# Altium PCB euu.PcbDoc
Units mm, origin at the board's own origin, x right, y up, seen from the top; angles counter-clockwise.
Board outline 35.28 x 34.49 mm, 2 copper layers (Top Layer, Bottom Layer), stack 1.58 mm thick; 25 components, 47 nets, 96 pads, 26 vias.
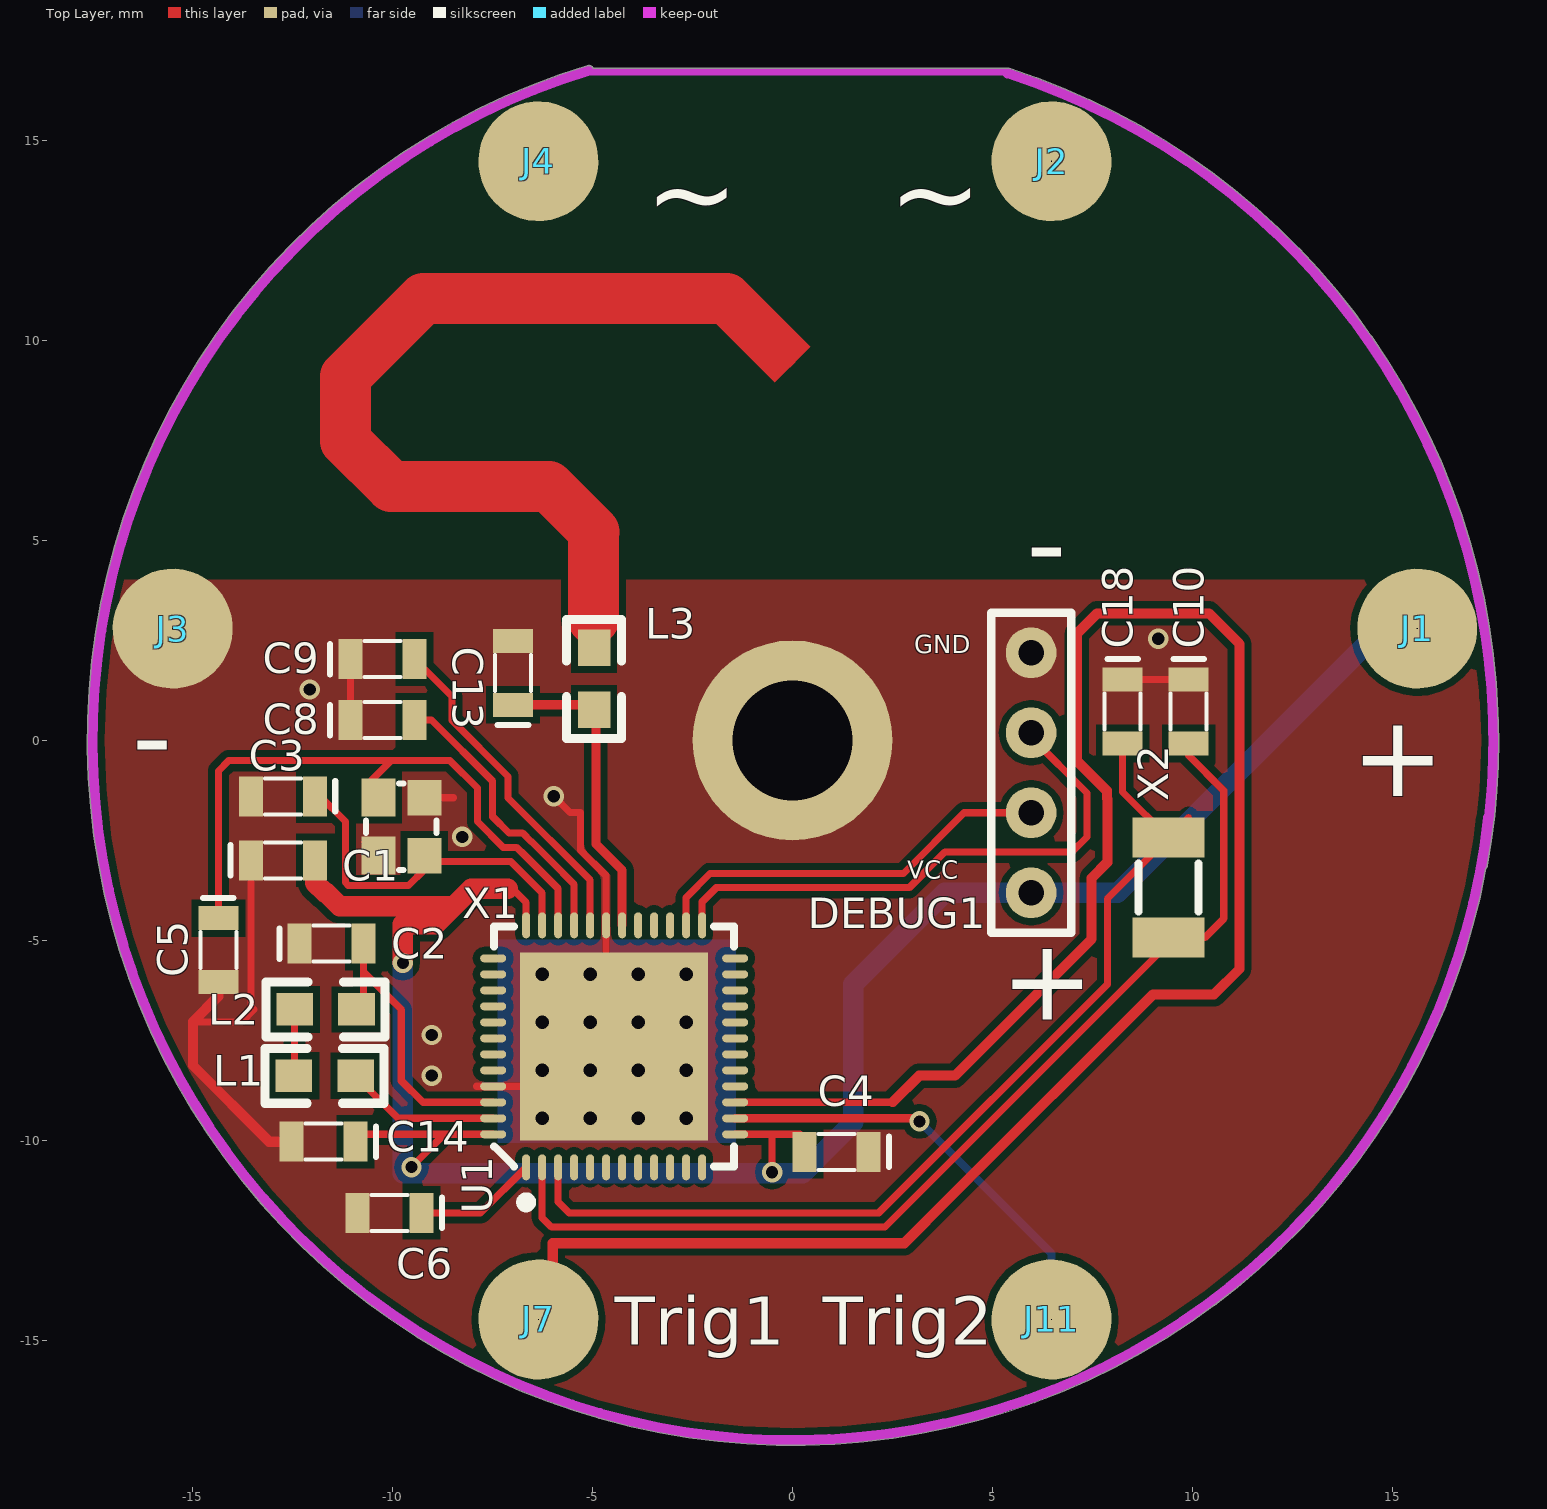
[diagram p0: Top Layer view]
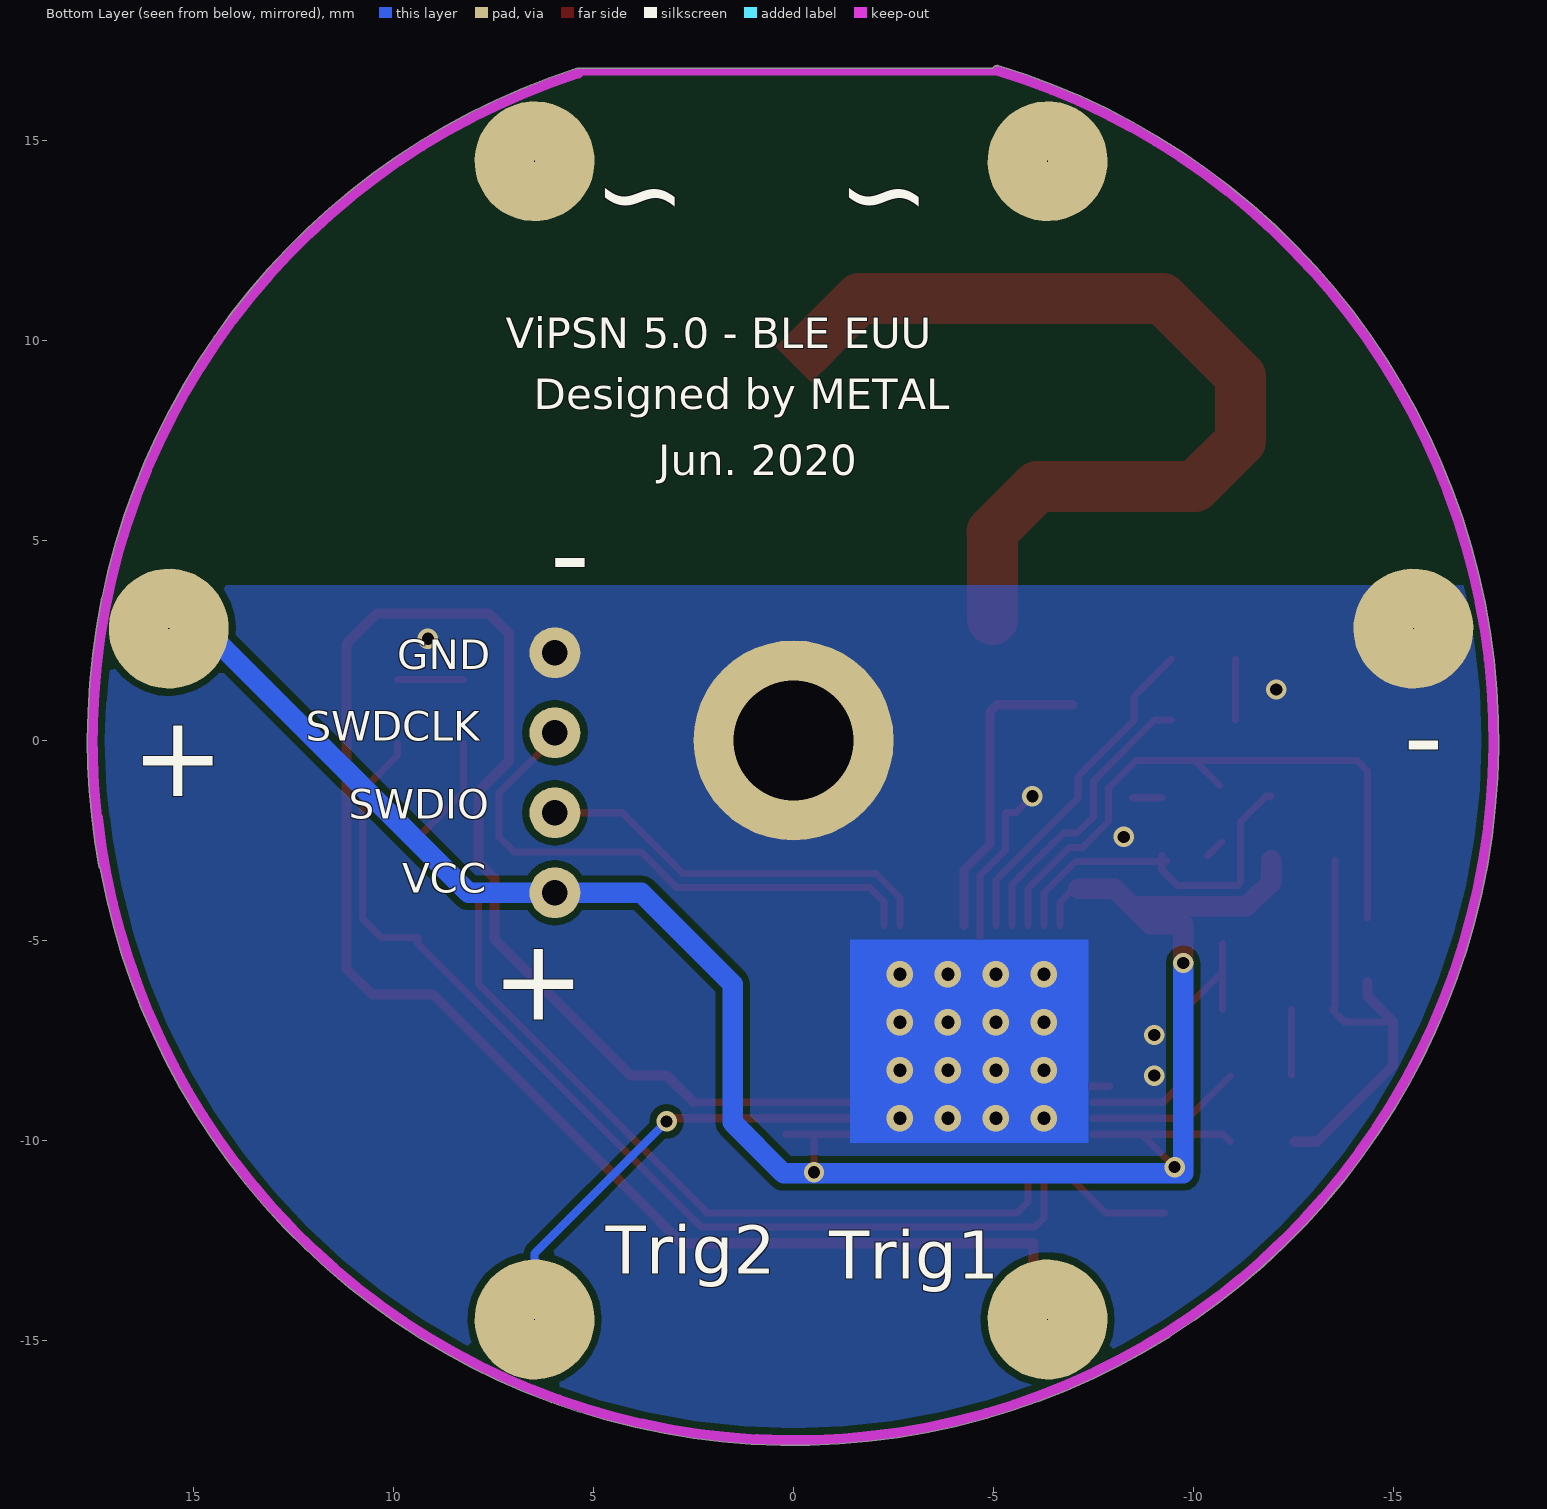
[diagram p1: Bottom Layer view, seen from below]
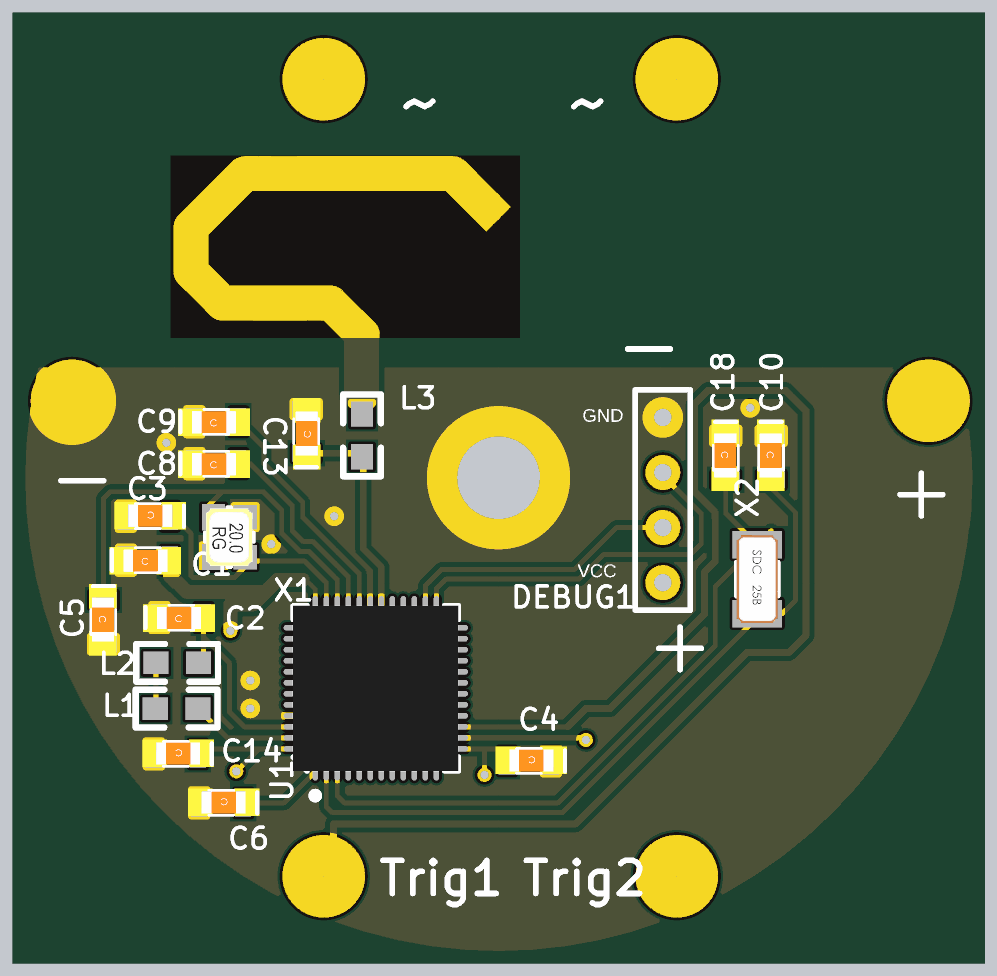
[diagram p2: 3D render of the assembled board from above, using the file's embedded part models]

## Layer stack, top to bottom
Top Layer: signal copper 0.0356
Dielectric: dielectric 1.509, FR-4, Dk 4.8
Bottom Layer: signal copper 0.0356

## Board outline
-5.128,16.867 ccw(c0.002,0.002) 17.337,-3.196 ccw(c17.249,-3.104) 17.374,-3.127 ccw(c0,0) 17.653,0 ccw(c0,0) 5.42,16.801 ccw(c5.381,16.68) 5.332,16.797 -4.975,16.797 ccw(c-5.091,16.745)

## Design rules (kind name [scope] priority, off if disabled: settings)
Clearance [All] p1: gap=0.178
ComponentClearance [All] p1: gap=0 collisioncheckmode=3 verticalgap=0 showdistances=FALSE
PlaneConnect [All] p1: planeconnectstyle=Direct reliefexpansion=0.508 reliefentries=4 reliefconductorwidth=0.254 reliefairgap=0.254
PolygonConnect [All] p1: connectstyle=Direct reliefconductorwidth=0.254 reliefentries=4 polygonreliefangle="90 Angle"
RoutingVias [All] p1: holewidth=0.711 width=1.27 viastyle="Through Hole" minholewidth=0.711 minwidth=1.27 maxholewidth=0.711 maxwidth=1.27
SilkscreenOverComponentPads [IsPad] p1: minsilkscreentomaskgap=0.254
SolderMaskExpansion [All] p1: expansion=0.102
Width [All] p1: maxlimit=2.54 minlimit=0.178 preferedwidth=1.27
25 further rules are at their usual default settings.

## Components (designator, comment, footprint, x,y, rotation, side; value= is the part's Value field where it differs from the comment)
C1 "4.7uF" 0603C -13.538,-2.997 r0 top
C2 "1uF" 0603C -12.319,-5.08 r0 top
C3 "12pF" 0603C -11.938,-1.397 r180 top
C4 "100nF" 0603C 1.905,-10.287 r180 top
C5 "12pF" 0603C -14.351,-4.445 r270 top
C6 "100nF" 0603C -9.271,-11.811 r180 top
C8 "100pF" 0603C -11.049,0.508 r0 top
C9 "NC" 0603C -11.049,2.032 r0 top
C10 "12pF" 0603C 9.906,1.524 r270 top
C13 "0.8pF" 0603C -6.985,0.889 r90 top
C14 "100nF" 0603C -10.922,-10.033 r180 top
C18 "12pF" 0603C 8.255,1.524 r270 top
DEBUG1 "" "SIP4 - 2.0" 5.969,-3.81 r90 top
J1 "Socket" PIN1 15.621,2.794 r100 top
J2 "Socket" PIN1 6.477,14.478 r130 top
J3 "Socket" PIN1 -15.494,2.794 r260 top
J4 "Socket" PIN1 -6.35,14.478 r230 top
J7 "Socket" PIN1 -6.35,-14.478 r340 top
J11 "Socket" PIN1 6.477,-14.478 r20 top
L1 "10uH" 0603 -10.922,-8.382 r180 top
L2 "15nH" 0603 -12.446,-6.731 r0 top
L3 "15nH" 0603 -4.953,0.762 r90 top
U1 "nRF52832-QFAA" QFN48 -4.457,-7.648 r90 top
X1 "32MHz" BT-XTAL_2016 -9.779,-2.159 r270 top
X2 "32.768kHz" XTAL_3215 9.398,-3.683 r270 top

## Footprints (in the part's own frame and the unit in brackets; to place one, negate y for a bottom-side part, rotate by r counter-clockwise, add the part's x,y. Pads: shape width x height; smd on the part's side, far side on the other; paste and mask are expansions set on the pad)
0603 [mil]
  rect 36x32 smd: 1(-0.04,0.2) 2(60.96,0.2)
  silkscreen extent -28,-27 89,27
0603C [mm]
  rect 0.6x1 smd: 1(0,0) 2(1.6,0)
  silkscreen extent -0.51,-0.45 1.25,0.45, body extent -0.59,-0.52 2.01,0.48, height 0.89
BT-XTAL_2016 [mm] "Crystal 2.0 x 1.6 mm"
  rect 0.95x0.85 smd: 1(-0.725,-0.575) 2(0.725,-0.575)
  rect 0.889x0.85 smd: 3(0.725,0.575) 4(-0.725,0.575)
  silkscreen extent -1.08,-0.88 1.08,0.88, body extent -1.05,-0.85 1.05,0.85, height 0.56
PIN1 [mm] "Connector; Plug"
  round 3 hole 0.015: 1(0,0)
QFN48 [mm] "QFN, 48-Leads, Body 6,0x6,0mm (max), Pitch 0,40mm, IPC Medium Density"
  oval 0.65x0.2 smd: 1(-3.025,2.2) 2(-3.025,1.8) 3(-3.025,1.4) 4(-3.025,1) 5(-3.025,0.6) 6(-3.025,0.2) 7(-3.025,-0.2) 8(-3.025,-0.6) 9(-3.025,-1) 10(-3.025,-1.4) 11(-3.025,-1.8) 12(-3.025,-2.2) 25(3.025,-2.2) 26(3.025,-1.8) 27(3.025,-1.4) 28(3.025,-1) 29(3.025,-0.6) 30(3.025,-0.2) 31(3.025,0.2) 32(3.025,0.6) 33(3.025,1) 34(3.025,1.4) 35(3.025,1.8) 36(3.025,2.2)
  oval 0.2x0.65 smd: 13(-2.2,-3.025) 14(-1.8,-3.025) 15(-1.4,-3.025) 16(-1,-3.025) 17(-0.6,-3.025) 18(-0.2,-3.025) 19(0.2,-3.025) 20(0.6,-3.025) 21(1,-3.025) 22(1.4,-3.025) 23(1.8,-3.025) 24(2.2,-3.025) 37(2.2,3.025) 38(1.8,3.025) 39(1.4,3.025) 40(1,3.025) 41(0.6,3.025) 42(0.2,3.025) 43(-0.2,3.025) 44(-0.6,3.025) 45(-1,3.025) 46(-1.4,3.025) 47(-1.8,3.025) 48(-2.2,3.025)
  rect 4.7x4.7 smd: 49(0,0)
  silkscreen extent -4.02,-3 3,3, body extent -3.02,-3.02 3.02,3.02, height 0.86
"SIP4 - 2.0" [mm]
  round 1.27 hole 0.635: 1(0,0) 2(2,0) 3(4,0) 4(6,0)
  silkscreen extent -1,-1 7,1
XTAL_3215 [mm] "XTAL SMD 3.2 x 1.5 mm"
  rect 1x1.8 smd: 1(-1.25,0) 2(1.25,0)
  silkscreen extent -0.6,-0.75 0.6,0.75, body extent -1.6,-0.75 1.6,0.75, height 0.81

## Part data
C1 C2 C4 C6 C8 C9 C13 C14: "Capacitor, NP0, ±2%"
C3 C5 C10 C18: library part C0402-12p, "Capacitor, NP0, ±2%"
DEBUG1: library part "Header 4"
L1 L2 L3: "High frequency chip inductor ±5%"
U1: "Multi-protocol Bluetooth Low Energy and 2.4GHz proprietary system-on-chip"
X1: library part XTAL_SMD2016_32MHz_8pF_Epson, "XTAL SMD 2016, 32MHz, Cl=8pF, Tol: ±10ppm, Stab: ±10ppm"
X2: library part "XTAL_FC-135 32.768k", "EPSON TOYOCOM - FC-135 32.768KHZ ±20PPM,9.0PF - CRYSTAL, SM, WATCH"

## Free pads (board coordinates)
  round 5 hole 3: 0(0,0)

## Via types
v1: diameter 0.66, hole 0.33, Top Layer to Bottom Layer, tented both sides, 16 vias
v2: diameter 0.508, hole 0.305, Top Layer to Bottom Layer, 10 vias

## Nets (pads, with @x,y where several pads share a name; then routed paths per layer and width w, separated by ;. In a path a pad name is that pad's centre, name@x,y a point inside that pad or via, vN(x,y) a via of type N, cw(c..) or ccw(c..) an arc to the next point about the centre after c; other vN are vias at no path point)
ANT: C13.1 L3.1 U1.30 | length 7.8
  Top Layer w0.229: C13.1 -5.086,0.889 L3.1 -4.914,0.717 -4.914,-2.588 -4.257,-3.245 U1.30
DEC2: C9.2 U1.32 | length 8.5
  Top Layer w0.178: C9.2 -8.514,1.097 -8.514,0.503 -7.112,-0.899 -7.112,-1.437 -5.057,-3.492 U1.32
DEC3: C8.2 U1.33 | length 7.2
  Top Layer w0.178: C8.2 -9.022,0.508 -7.494,-1.02 -7.494,-1.909 -7.085,-2.318 -6.744,-2.318 -6.532,-2.53 ; -6.527,-2.525 -5.735,-3.317 -5.735,-3.322 -5.457,-3.6 U1.33
EXTI: J11.1 U1.14 | length 11
  Top Layer w0.203: U1.14 3.098,-9.448 v2(3.175,-9.525)
  Bottom Layer w0.203: v2(3.175,-9.525) 6.477,-12.827 J11.1
GND: C1.1 C2.1 C3.2 C4.1 C5.2 C6.2 C8.1 C9.1 C10.1 C13.2 C14.2 C18.1 DEBUG1.4 J3.1 pad.0 U1.31 U1.45 U1.49 X1.2 X1.4 | length 26.3
  Top Layer w0.178: -14.986,-7.036 -13.767,-7.036 -13.462,-6.731 -13.538,-6.655 C1.1 ; C8.1 C9.1 ; X1.2@-10.698,-2.54 X1.2 ; X1.4 -8.472,-1.434 ; -7.902,-8.648 U1.45 -5.457,-8.648 v1(-5.057,-8.248) U1.49 -4.657,-7.448 U1.31 -4.657,-3.384 -5.295,-2.746 -5.295,-1.806 -5.56,-1.806 v2(-5.969,-1.397) ; C18.1 C10.1
  Top Layer w0.254: C5.2 -14.351,-6.401 -14.986,-7.036 -14.986,-8.128 -13.081,-10.033 C14.2
  other v1: -6.257,-9.448 -5.057,-9.448 -3.857,-9.448 -2.657,-9.448 -6.257,-8.248 -3.857,-8.248 -2.657,-8.248 -6.257,-7.048 -5.057,-7.048 -3.857,-7.048 -2.657,-7.048 -6.257,-5.848 -5.057,-5.848 -3.857,-5.848 -2.657,-5.848
  other v2: -9.017,-8.382 -9.017,-7.366 -8.255,-2.413 -12.065,1.27 9.144,2.54
NetC2_2: C2.2 L2.2 U1.46 | length 7.3
  Top Layer w0.178: L2.2@-10.719,-6.726 -10.719,-5.791 ; C2.2 -10.719,-5.791 ; U1.46 -9.24,-9.048 -9.779,-8.509 -9.779,-6.731 -10.719,-5.791
NetC6_1: C6.1 U1.1 | length 3.1
  Top Layer w0.178: C6.1 -7.795,-11.811 U1.1
NetL1_1: L1.1 U1.47 | length 3.9
  Top Layer w0.178: L1.1 -9.86,-9.448 U1.47
NetL1_2: L1.2 L2.1 | length 1.6
  Top Layer w0.178: L1.2@-12.447,-8.364 L2.1
P0.02: U1.4
P0.03: U1.5
P0.04: U1.6
P0.05: U1.7
P0.06: U1.8
P0.07: U1.9
P0.08: U1.10
P0.09/NFC1: U1.11
P0.10/NFC2: U1.12
P0.12: J7.1 U1.15 | length 53.9
  Top Layer w0.178: U1.15 2.509,-9.048 2.512,-9.045
  Top Layer w0.254: J7.1 -5.991,-14.119 -5.991,-12.573 2.794,-12.573 3.937,-11.43 ; 2.509,-9.042 3.169,-8.382 4.064,-8.382 7.48,-4.966 7.48,-3.442 7.874,-3.048 7.874,-1.466 7.861,-1.453 7.861,-1.257 7.112,-0.508 7.112,2.667 7.62,3.175 10.414,3.175 11.176,2.413 11.176,-5.715 10.541,-6.35 9.017,-6.35 3.937,-11.43 ; 4.191,-11.176 3.937,-11.43
P0.13: U1.16
P0.14: U1.17
P0.15: U1.18
P0.16: U1.19
P0.17: U1.20
P0.18: U1.21
P0.19: U1.22
P0.20: U1.23
P0.22: U1.27
P0.23: U1.28
P0.24: U1.29
P0.25: U1.37
P0.26: U1.38
P0.27: U1.39
P0.28: U1.40
P0.29: U1.41
P0.30: U1.42
P0.31: U1.43
RF: L3.2 | length 22.7
  Top Layer w1.27: -6.218,6.345 -10.028,6.345 -11.171,7.488 -11.171,9.097 -9.224,11.044 -1.646,11.044 -0.439,9.837 ; -6.091,6.345 -4.953,5.207 ; -4.97,3.02 -4.97,5.057
SWDCLK: DEBUG1.3 U1.25 | length 14.1
  Top Layer w0.178: U1.25 -2.257,-4.035 -1.905,-3.683 2.921,-3.683 3.81,-2.794 6.985,-2.794 7.366,-2.413 7.366,-1.319 5.969,0.078 DEBUG1.3
SWDIO: DEBUG1.2 U1.26 | length 10.9
  Top Layer w0.178: U1.26 -2.657,-3.927 -2.057,-3.327 2.774,-3.327 4.291,-1.81 ; 4.953,-1.81 4.291,-1.81 ; DEBUG1.2 4.291,-1.81
VIN+: J4.1 | length 0.1
  Top Layer w0.254: J4.1 J4.1@-6.283,14.478
VIN-: J2.1
VOUT: C1.2 C4.2 C14.1 DEBUG1.1 J1.1 U1.13 U1.36 U1.48 | length 54.8
  Top Layer w0.178: C14.1 -10.737,-9.848 -8.705,-9.848 ; v2(-9.525,-10.668) -8.705,-9.848 ; U1.48 -8.705,-9.848 ; -6.997,-3.711 -6.657,-4.051 U1.36 ; U1.13 -0.508,-9.848 ; v2(-0.508,-10.795) -0.508,-9.848 ; C4.2@0.185,-9.848 -0.508,-9.848
  Top Layer w0.508: C1.2 -11.938,-3.556 -11.684,-3.81 ; -11.658,-3.81 -11.322,-4.146 -8.464,-4.146 ; v2(-9.739,-5.565) -9.739,-4.6 -8.918,-4.6 -8.464,-4.146 ; -7.112,-3.711 -8.029,-3.711 -8.464,-4.146
  Bottom Layer w0.508: v2(-9.739,-5.565) -9.739,-10.823 0.254,-10.823 1.524,-9.553 1.524,-6.096 3.81,-3.81 DEBUG1.1 8.128,-3.81 14.732,2.794 J1.1
XC1: C5.1 U1.34 X1.1 | length 15.9
  Top Layer w0.178: C5.1 -14.351,-1.27 -14.351,-0.762 -14.097,-0.508 -10.033,-0.508 ; X1.1@-10.657,-1.132 -10.033,-0.508 ; U1.34 -5.857,-3.708 -6.781,-2.784 -6.786,-2.784 -6.896,-2.674 -7.232,-2.674 -7.874,-2.032 -7.874,-1.192 -8.558,-0.508 -10.033,-0.508
XC2: C3.1 U1.35 X1.3 | length 9.7
  Top Layer w0.178: C3.1 -11.811,-1.397 -11.176,-2.032 -11.176,-3.556 -11.106,-3.626 -9.595,-3.626 -9.204,-3.235 X1.3 ; X1.3@-9.331,-3.011 -9.312,-3.03 -8.255,-3.03 ; -8.648,-3.03 -8.255,-3.03 ; U1.35 -6.257,-3.816 -7.043,-3.03 -8.255,-3.03
XL1: C10.2 U1.2 X2.2 | length 26.6
  Top Layer w0.178: U1.2 -6.257,-11.938 -6.028,-12.167 2.311,-12.167 6.477,-8.001 ; 6.579,-7.899 6.477,-8.001 ; C10.2 9.906,-0.381 10.782,-1.257 10.782,-4.458 10.307,-4.933 X2.2 9.398,-5.08 6.477,-8.001
XL2: C18.2 U1.3 X2.1 | length 24.9
  Top Layer w0.178: U1.3 -5.857,-11.542 -5.588,-11.811 2.159,-11.811 7.874,-6.096 7.874,-3.957 X2.1 ; C18.2 8.255,-1.29 X2.1 ; 9.906,-1.925 X2.1
pads on no net: U1.24 U1.44

## Polygon pours and split planes (outlines as drawn)
GND on Top Layer "Top Layer-No Net" (solid, remove dead copper, pour order 1000): -21.717,20.701 -21.463,20.447 22.733,20.447 22.733,-16.51 18.542,-20.701 17.907,-21.336 -20.193,-21.336 -20.193,18.669 -13.462,25.4
GND on Bottom Layer "Top Layer-No Net" (solid, remove dead copper, pour order 1001): -22.352,17.018 -18.923,20.447 22.987,20.447 22.987,-23.622 21.717,-24.892 17.018,-20.193 -22.86,-20.193 -22.86,16.637 -13.589,25.908

## Keep-outs
Keep-Out Layer:
  lines w0.178: -5.323,16.708 5.39,16.708 -5.323,16.708
  lines w0.254: -5.091,16.745 ccw(c0.002,0.002) 17.395,-1.933 ; 5.381,16.68 cw(c0,0) 17.249,-3.104 ccw(c0,0) 17.181,3.458

## Other copper
Top Layer:
  region net RF: -0.122,10.409 0.45,9.837 -0.439,8.948 -1.011,9.52
Bottom Layer:
  region net GND: -7.378,-4.981 -7.378,-10.061 -1.409,-10.061 -1.409,-4.981

## Silkscreen, mask and mechanical layers (free items; w line width, h text height)
Top Overlay:
  text "~" at -3.683,12.7 h2.03
  text "~" at 2.413,12.7 h2.03
  text "-" at 6.858,5.461 h2.03 r180
  text "GND" at 3.048,2.032 h0.76
  text "-" at -16.51,-0.889 h2.03
  text "+" at 13.97,-1.397 h2.03
  text "VCC" at 2.869,-3.611 h0.76
  text "+" at 5.207,-6.985 h2.03
  text "Trig1" at -4.445,-15.113 h1.2
  text "Trig2" at 0.762,-15.113 h1.2
Bottom Overlay:
  text "~" at -3.429,12.7 h2.03
  text "~" at 2.667,12.7 h2.03
  text "ViPSN 5.0 - BLE EUU" at 7.193,9.802 h0.76
  text "Designed by METAL" at 6.494,8.278 h0.76
  text "Jun. 2020" at 3.384,6.627 h0.76
  text "-" at 5.08,3.683 h2.03
  text "GND" at 9.906,1.524 h1.27
  text "SWDCLK" at 12.192,-0.254 h1.27
  text "-" at -16.256,-0.889 h2.03
  text "+" at 14.224,-1.397 h2.03
  text "SWDIO" at 11.126,-2.209 h1.27
  text "VCC" at 9.779,-4.064 h1.27
  text "+" at 5.207,-6.985 h2.03
  text "Trig2" at 4.699,-13.335 h1.2
  text "Trig1" at -0.889,-13.462 h1.2
Top Solder:
  region: -11.921,11.707 -11.921,5.075 0.779,5.075 0.779,11.707